# Altium PCB PCB1.PcbDoc
Units mm, origin at the board's own origin, x right, y up, seen from the top; angles counter-clockwise.
Board outline 46.86 x 32.13 mm, 2 copper layers (Top Layer, Bottom Layer); 34 components, 39 nets, 139 pads, 0 vias.
Unrouted connection lines stored in the file: 99.
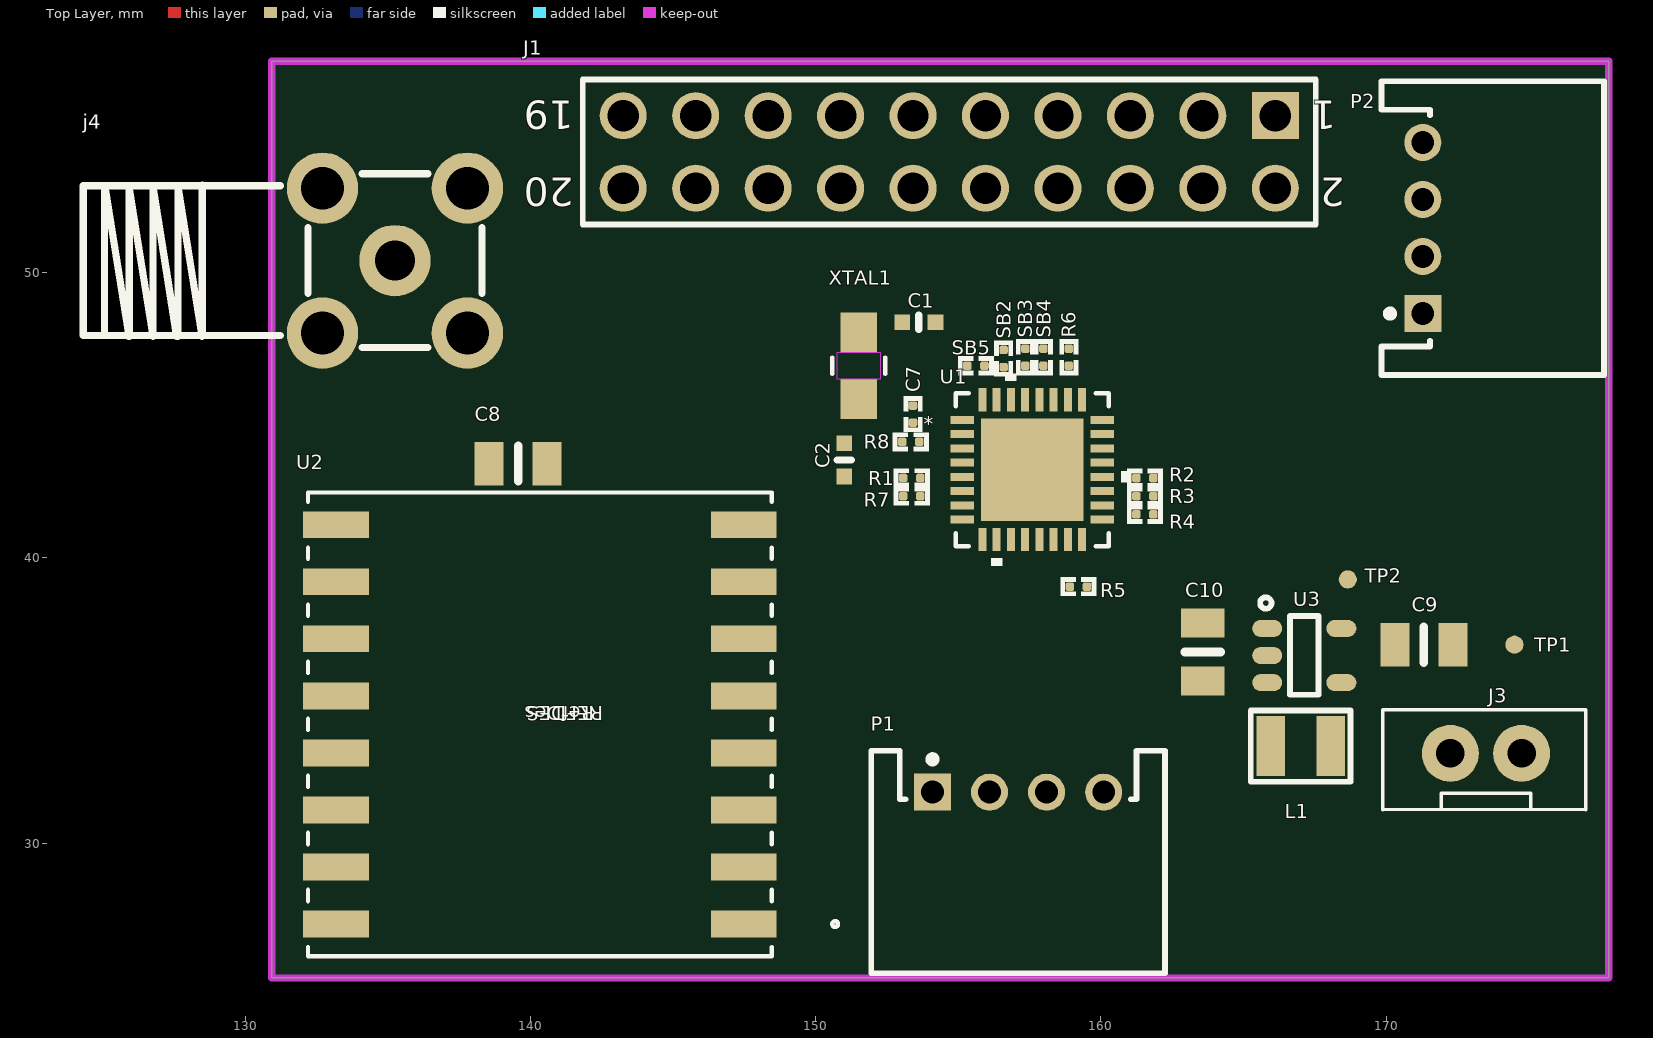
[diagram p0: Top Layer view]
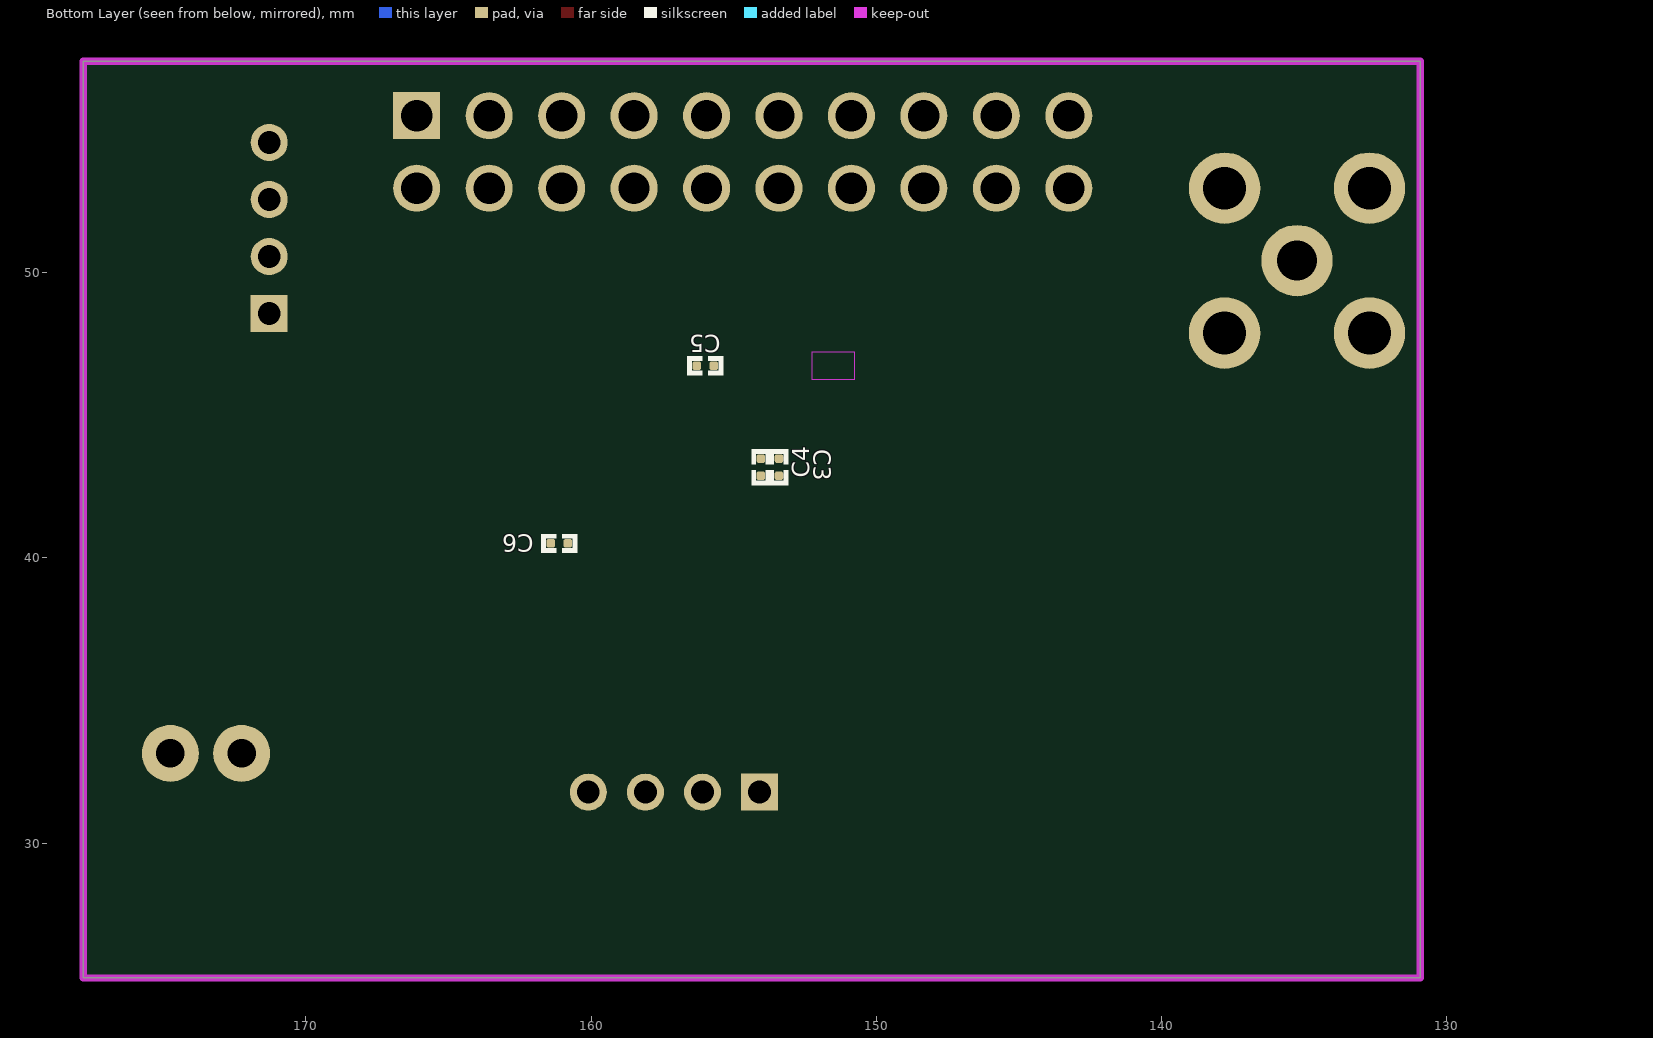
[diagram p1: Bottom Layer view, seen from below]

## Layer stack, top to bottom
Top Solder: solder mask 0.0102, Solder Resist, Dk 3.5
Top Layer: signal copper 0.0356
Dielectric 1: dielectric 0.32, FR-4, Dk 4.8
Bottom Layer: signal copper 0.0356
Bottom Solder: solder mask 0.0102, Solder Resist, Dk 3.5

## Board outline
130.937,25.273 177.8,25.273 177.8,57.404 130.937,57.404

## Design rules (kind name [scope] priority, off if disabled: settings)
Clearance [All] p1: gap=0.2 ignorepadtopadclearanceinfootprint=FALSE
PolygonConnect [All] p1: connectstyle=Relief reliefconductorwidth=0.254 reliefentries=4 polygonreliefangle="90 Angle" airgapwidth=0.254
RoutingVias [All] p1: holewidth=0.4 width=0.6 viastyle="Through Hole" minholewidth=0.3 minwidth=0.5 maxholewidth=0.8 maxwidth=1
SolderMaskExpansion [All] p1: expansion=0.102 istentingtop=FALSE
Width "Schematic Width Constraint_3" [InNet('VDD_MCU')] p1: maxlimit=0.4 minlimit=0.254 preferedwidth=0.3 minimp=50.000000 maximp=50.000000 favimp=50.000000
Width "Schematic Width Constraint_2" [InNet('GND')] p2: maxlimit=0.4 minlimit=0.254 preferedwidth=0.3 minimp=50.000000 maximp=50.000000 favimp=50.000000
Width [All] p3: maxlimit=0.2 minlimit=0.2 preferedwidth=0.2
30 further rules are at their usual default settings.

## Components (designator, comment, footprint, x,y, rotation, side; value= is the part's Value field where it differs from the comment)
C1 "7pF" SMD-0402C 153.619,48.258 r270 top
C2 "7pF" SMD-0402C 151.003,43.434 r0 top
C3 "100nF" Cap0201 153.416,43.178 r90 bottom
C4 "100nF" Cap0201 154.051,43.178 r90 bottom
C5 "100nF" Cap0201 156.002,46.734 r0 bottom
C6 "1µF" Cap0201 161.117,40.511 r180 bottom
C7 "100nF" Cap0201 153.416,45.037 r90 top
C8 "10µF" SMD-0805C 139.573,43.307 r90 top
C9 "10µF" SMD-0805C 171.323,36.957 r90 top
C10 "4.7µF" SMD-0805C 163.576,36.703 r0 top
J1 "2.54 mm_THT_Vertical_20 pin" 61302021121 154.686,54.229 r180 top
J3 "JST-2.54-2P-90" JST-2.54-2P-90 173.441,32.926 r270 top
j4 "ANTENNA-SMA-90" ANTENNA-SMA-90 135.255,50.419 r90 top
L1 "3.3uH/1.4A" INDP2520x12N 167.005,33.401 r0 top
P1 "62000411722" 62000411722 157.099,29.337 r0 top
P2 "62000411722" 62000411722 173.736,51.562 r90 top
R1 "10k" Res0201 153.37,42.801 r180 top
R2 "10k" Res0201 161.544,42.797 r0 top
R3 "10k" Res0201 161.544,42.162 r0 top
R4 "10k" Res0201 161.544,41.527 r0 top
R5 "10k" Res0201 159.212,38.989 r0 top
R6 "10k" Res0201 158.877,47.034 r90 top
R7 "10k" Res0201 153.37,42.162 r0 top
R8 "10k" Res0201 153.335,44.069 r0 top
SB2 "0R" Res0201 156.591,46.988 r90 top
SB3 "0R" Res0201 157.353,47.034 r90 top
SB4 "0R" Res0201 157.988,47.034 r90 top
SB5 "0R" Res0201 155.621,46.734 r0 top
TP1 "TPSMD_25mil" TPSMD_25mil 174.498,36.957 r90 top
TP2 "TPSMD_25mil" TPSMD_25mil 168.656,39.243 r90 top
U1 "STM32L072KBU6" UFQFPN32-5x5mm-L 157.595,43.089 r0 top
U2 "RFM95W-915S2" IC16_RFM95W-915S2_RFS 140.335,34.163 r180 top
U3 "RT8008-33GB" "SOT23, 5" 167.132,36.576 r0 top
XTAL1 "ABS07-166-32.768KHZ-T" XTAL_ABS07-166-32.768KHZ-T_ABR 151.511,46.734 r90 top

## Footprints (in the part's own frame and the unit in brackets; to place one, negate y for a bottom-side part, rotate by r counter-clockwise, add the part's x,y. Pads: shape width x height; smd on the part's side, far side on the other; paste and mask are expansions set on the pad)
61302021121 [mm] "Pin Header, pitch 2.54 mm, THT, Vertical, dual row, 20p"
  rect 1.65x1.65 hole 1.1: 1(-11.43,-1.27)
  round 1.65 hole 1.1: 2(-11.43,1.27) 3(-8.89,-1.27) 4(-8.89,1.27) 5(-6.35,-1.27) 6(-6.35,1.27) 7(-3.81,-1.27) 8(-3.81,1.27) 9(-1.27,-1.27) 10(-1.27,1.27) 11(1.27,-1.27) 12(1.27,1.27) 13(3.81,-1.27) 14(3.81,1.27) 15(6.35,-1.27) 16(6.35,1.27) 17(8.89,-1.27) 18(8.89,1.27) 19(11.43,-1.27) 20(11.43,1.27)
  silkscreen extent -12.85,-2.54 12.85,2.54, body extent -12.7,-2.54 12.7,2.54, height 8.59
62000411722 [mm] "2.00mm Male Horizontal Shrouded Header, 4p"
  rect 1.3x1.3 hole 0.8: 1(-3,2.45)
  round 1.3 hole 0.8: 2(-1,2.45) 3(1,2.45) 4(3,2.45)
  silkscreen extent -5.15,-3.9 5.15,3.9, body extent -5,-3.8 5,3.8, height 4.83
ANTENNA-SMA-90 [mm]
  round 2.5 hole 1.5 paste-2539.97 mask+0.051: 1(-2.54,2.54) 2(2.54,2.54) 3(2.54,-2.54) 4(-2.54,-2.54)
  round 2.5 hole 1.4 paste-2539.97 mask+0.051: 5(0,0)
  silkscreen extent -3.05,-3.05 3.05,10.92, body extent -3.5,-3.5 3.5,11, height 10
Cap0201 [mm] "CHIP Capacitor, 0.5x0.25mm, 0201"
  rrect50% 0.3x0.3 smd mask+0.05: 1(-0.3,0) 2(0.3,0)
  silkscreen extent -0.63,-0.32 0.63,0.33, body extent -0.44,-0.15 0.44,0.15, height 0.31
IC16_RFM95W-915S2_RFS [mm]
  rect 2.307x0.941 smd paste+0 mask+0: 1(-7.148,7) 2(-7.148,5) 3(-7.148,3) 4(-7.148,1) 5(-7.148,-1) 6(-7.148,-3) 7(-7.148,-5) 8(-7.148,-7) 9(7.148,-7) 10(7.148,-5) 11(7.148,-3) 12(7.148,-1) 13(7.148,1) 14(7.148,3) 15(7.148,5) 16(7.148,7)
  silkscreen extent -10.45,-8.13 8.13,8.13, body extent -8,-8 8,8, height 1.81
INDP2520x12N [mm]
  rect 1x2.1 smd: 1(-1.05,0) 2(1.05,0)
  silkscreen extent -1.75,-1.25 1.75,1.25, body extent -1.28,-1 1.22,1, height 1.2
JST-2.54-2P-90 [mm]
  round 2 hole 1: 1(-0.221,1.311) 2(-0.221,-1.189)
  silkscreen extent -1.75,-3.56 1.75,3.56, body extent -0.6,-3.61 7.43,3.61, height 5.94
Res0201 [mm] "CHIP Capacitor, 0.5x0.25mm, 0201"
  rrect50% 0.3x0.3 smd mask+0.05: 1(-0.3,0) 2(0.3,0)
  silkscreen extent -0.63,-0.32 0.63,0.33, body extent -0.44,-0.15 0.44,0.15, height 0.31
SMD-0402C [mm]
  rect 0.55x0.55 smd: 1(0,0.584) 2(0,-0.584)
  silkscreen extent -0.25,0 0.25,0, body extent -0.25,-0.51 0.25,0.51, height 0.51
SMD-0805C [mil]
  rect 60x40 smd: 1(0,40) 2(0,-40)
  silkscreen extent -25,0 25,0, body extent -25,-39 25,39, height 35
"SOT23, 5" [mm]
  oval 1.05x0.6 smd: 1(-1.3,0.95) 2(-1.3,0) 3(-1.3,-0.95) 4(1.3,-0.95) 5(1.3,0.95)
  silkscreen extent -1.55,-1.37 0.5,2.04, body extent -1.39,-1.47 1.41,1.43, height 1.45
TPSMD_25mil [mm] "Test Point, SMD Pad, Circle, 25mil X 25mil"
  round 0.635 smd paste-0.61 mask+0.076: 1(0,0)
UFQFPN32-5x5mm-L [mil]
  rect 32x11 smd paste-16 mask-16: 1(-96.5,68.9) 2(-96.5,49.21) 3(-96.5,29.53) 4(-96.5,9.84) 5(-96.5,-9.84) 6(-96.5,-29.53) 7(-96.5,-49.21) 8(-96.5,-68.9) 17(96.5,-68.9) 18(96.5,-49.21) 19(96.5,-29.53) 20(96.5,-9.84) 21(96.5,9.84) 22(96.5,29.53) 23(96.5,49.21) 24(96.5,68.9)
  rect 11x32 smd paste-16 mask-16: 9(-68.9,-96.5) 10(-49.21,-96.5) 11(-29.53,-96.5) 12(-9.84,-96.5) 13(9.84,-96.5) 14(29.53,-96.5) 15(49.21,-96.5) 16(68.9,-96.5) 25(68.9,96.5) 26(49.21,96.5) 27(29.53,96.5) 28(9.84,96.5) 29(-9.84,96.5) 30(-29.53,96.5) 31(-49.21,96.5) 32(-68.9,96.5)
  rect 142x142 smd paste-70.5 mask-71: 33(0,0)
  silkscreen extent -106,-132 132,132, body extent -103,-103 103,103, height 22
XTAL_ABS07-166-32.768KHZ-T_ABR [mil]
  rect 55x50 smd paste+0 mask+0: 1(-45.96,0) 2(45.96,0)
  Top Layer keep-out region: -18.96,-29.5 -18.96,29.5 18.96,29.5 18.96,-29.5
  Keep-Out Layer region: -18.96,-29.5 -18.96,29.5 18.96,29.5 18.96,-29.5
  silkscreen extent -11,-37 11,36, body extent -71,-43 71,43, height 35

## Part data
C1 C2: library part GJM1555C1H7R0DB01D, "CAP CER 7PF 50V NP0 0402", Digi-Key Part Number=490-13315-1-ND, Manufacturer="Murata Electronics North America", Operating Temperature="-55°C ~ 125°C", Package / Case="0402 (1005 Metric)", Ratings=-, Temperature Coefficient="C0G, NP0", Tolerance=±0.5pF, Voltage=50V, @ qty=0, Applications="RF, Microwave, High Frequency", Datasheets=http://www.murata.com/~/media/webrenewal/support/library/catalog/products/capacitor/mlcc/c02e.pdf, Factory Stock=0, Features="High Q, Low Loss", Height - Seated (Max)=-, Image=//media.digikey.com/Renders/Murata%20Renders/ZRB-SERIES-0402.jpg, Lead Spacing=-, Lead Style=-, Minimum Quantity=1, Mounting Type="Surface Mount, MLCC", Packaging="Cut Tape (CT)", Part Number=GJM1555C1H7R0DB01D, Part Status=Active, Quantity Available=9210, Series=GJM, Size / Dimension="0.039\" L x 0.020\" W (1.00mm x 0.50mm)", Thickness (Max)="0.022\" (0.55mm)", Unit Price (USD)=0.12
C3 C4 C5 C7: library part GRM033R61A104ME15D, "CAP CER 0.1UF 10V X5R 0201", Digi-Key Part Number=490-5405-1-ND, Manufacturer="Murata Electronics North America", Operating Temperature="-55°C ~ 85°C", Package / Case="0.024\" L x 0.012\" W (0.60mm x 0.30mm)", Ratings=-, Temperature Coefficient=X5R, Tolerance=±20%, Voltage=10V, @ qty=0, Applications="General Purpose", Datasheets=http://www.murata.com/~/media/webrenewal/support/library/catalog/products/capacitor/mlcc/c02e.pdf, Factory Stock=0, Failure Rate="Surface Mount, MLCC", Features=-, Height - Seated (Max)="0.013\" (0.33mm)", Image=//media.digikey.com/Renders/Murata%20Renders/ZRB-SERIES-0402.jpg, Lead Spacing=-, Minimum Quantity=1, Mounting Type="0201 (0603 Metric)", Packaging="Cut Tape (CT)", Part Number=GRM033R61A104ME15D, Part Status=Active, Quantity Available=295564, Series=GRM, Size / Dimension=-, Thickness (Max)=-, Unit Price (USD)=0.1
C6: library part GRM033R61A105ME15D, "CAP CER 1UF 10V X5R 0201", Digi-Key Part Number=490-13226-1-ND, Manufacturer="Murata Electronics North America", Operating Temperature="-55°C ~ 85°C", Package / Case="0.024\" L x 0.012\" W (0.60mm x 0.30mm)", Ratings=-, Temperature Coefficient=X5R, Tolerance=±20%, Voltage=10V, @ qty=0, Applications="General Purpose", Datasheets=http://www.murata.com/~/media/webrenewal/support/library/catalog/products/capacitor/mlcc/c02e.pdf, Factory Stock=0, Failure Rate="Surface Mount, MLCC", Features=-, Height - Seated (Max)="0.015\" (0.39mm)", Image=//media.digikey.com/Renders/Murata%20Renders/ZRB-SERIES-0402.jpg, Lead Spacing=-, Minimum Quantity=1, Mounting Type="0201 (0603 Metric)", Packaging="Cut Tape (CT)", Part Number=GRM033R61A105ME15D, Part Status=Active, Quantity Available=233419, Series=GRM, Size / Dimension=-, Thickness (Max)=-, Unit Price (USD)=0.37
C8 C9: library part GRJ21BR71A106KE01L, "CAP CER 10UF 10V X7R 0805", Digi-Key Part Number=490-10919-1-ND, Manufacturer="Murata Electronics North America", Operating Temperature="-55°C ~ 125°C", Package / Case="0805 (2012 Metric)", Ratings=-, Temperature Coefficient=X7R, Tolerance=±10%, Voltage=10V, @ qty=0, Applications="Boardflex Sensitive", Datasheets=http://www.murata.com/~/media/webrenewal/support/library/catalog/products/capacitor/mlcc/c02e.pdf, Factory Stock=0, Features="Soft Termination", Height - Seated (Max)=-, Image=//media.digikey.com/Renders/Murata%20Renders/0805%20(2012%20Metric)%20.85mm.jpg, Lead Spacing=-, Lead Style=-, Minimum Quantity=1, Mounting Type="Surface Mount, MLCC", Packaging="Cut Tape (CT)", Part Number=GRJ21BR71A106KE01L, Part Status=Active, Quantity Available=6658, Series=GRJ, Size / Dimension="0.079\" L x 0.049\" W (2.00mm x 1.25mm)", Thickness (Max)="0.057\" (1.45mm)", Unit Price (USD)=0.69
C10: library part GRM21BR60J475KA11L, "CAP CER 4.7UF 6.3V X5R 0805", Digi-Key Part Number=490-9749-1-ND, Manufacturer="Murata Electronics North America", Operating Temperature="-55°C ~ 85°C", Package / Case="0805 (2012 Metric)", Ratings=-, Temperature Coefficient=X5R, Tolerance=±10%, Voltage=6.3V, @ qty=0, Applications="General Purpose", Datasheets=http://www.murata.com/~/media/webrenewal/support/library/catalog/products/capacitor/mlcc/c02e.pdf, Factory Stock=0, Features=-, Height - Seated (Max)=-, Image=//media.digikey.com/Renders/Murata%20Renders/0805%20(2012%20Metric)%20.85mm.jpg, Lead Spacing=-, Lead Style=-, Minimum Quantity=1, Mounting Type="Surface Mount, MLCC", Packaging="Cut Tape (CT)", Part Number=GRM21BR60J475KA11L, Part Status=Active, Quantity Available=2821, Series=GRM, Size / Dimension="0.079\" L x 0.049\" W (2.00mm x 1.25mm)", Thickness (Max)="0.055\" (1.40mm)", Unit Price (USD)=0.28
J1: library part 61302021121, "Pin Header WR-PHD, pitch 2.54 mm, THT, Vertical, dual row, 20 pin", Contact Resistance="20 mOhm", Insulation Resistance=">1000 MOhm", Operating Temperature="-40 to 105 degC", Rated Current="3 A", Working Voltage="250 VAC", ComponentLink1Description=Manufacturer, ComponentLink1URL=http://www.we-online.de, ComponentLink2Description=Datasheet, ComponentLink2URL=http://katalog.we-online.de/em/datasheet/6130xx21121.pdf, Mounting Technology=THT, Orientation=Vertical, Part Number=61302021121, Pin Number=20, Pitch="2.54 mm", Published Date="Jan. 2018", Publisher="Wurth Elektronik", Row Number=Dual
J3: "Female Connector JST 2 Vias, 2.54mm 90º."
j4: "Connector SMA for Antenna, 90º.", JLCPCB PN=C914554
L1: library part ASPI-2515-3R3M-T2, "Inductor_3.3uH 20%_1.3A_SMD 25*20", MANF="Abracon LLC", MANF_P#=ASPI-2515-3R3M-T2, PARAM="Inductor 6.8uH 20% SMT 1.3A", PARAM2="138mOhm DCR, –25 to +120°C", PRICE=$0.28@100
P1 P2: "WR-WTB THT Male Horizontal Shrouded Header, pitch 2mm, 4p", Contact Resistance=20mOhm, Operating Temperature="-25 to +85degC", Rated Current=2A, Withstanding Voltage=800VAC, Working Voltage=125VAC, ComponentLink1Description=Manufacturer, ComponentLink1URL=http://www.we-online.de, ComponentLink2Description=Datasheet, ComponentLink2URL=https://www.we-online.com/catalog/datasheet/62000411722.pdf, Gender=Male, Mounting Technology=THT, Packaging=Bag, Part Number=62000411722, Pin Number=4, Pitch=2mm, Published Date="January 2020", Publisher="Wurth Elektronik", Type=Horizontal
R1 R2 R3 R4 R5 R6 R7 R8: library part ERJ-1GEF1002C, "RES SMD 10K OHM 1% 1/20W 0201", Digi-Key Part Number=P10.0KABCT-ND, Manufacturer="Panasonic Electronic Components", Operating Temperature="-55°C ~ 125°C", Package / Case="0201 (0603 Metric)", Power (Watts)="0.05W, 1/20W", Supplier Device Package=0201, Temperature Coefficient=±200ppm/°C, Tolerance=±1%, @ qty=1500, Composition="Thick Film", Datasheets=//media.digikey.com/pdf/Data%20Sheets/Panasonic%20Resistors%20Thermistors%20PDFs/ERJ_G,R,E_Rev08.pdf, Factory Stock=0, Failure Rate=-, Features=-, Height - Seated (Max)="0.010\" (0.26mm)", Image=//media.digikey.com/Renders/Panasonic%20Renders/ERJ-0201%20Pkg.jpg, Minimum Quantity=1, Number of Terminations=2, Packaging="Cut Tape (CT)", Part Number=ERJ-1GEF1002C, Part Status=Active, Quantity Available=2802306, Series=ERJ, Size / Dimension="0.024\" L x 0.012\" W (0.60mm x 0.30mm)", Unit Price (USD)=0.00933
SB2 SB3 SB4 SB5: library part RC0201JR-070RL, "RES_0 Ohm_ Jumper_1/16W_SMD 0402", ASSEMBLY=ASSEMBLY, MANF=Yageo, MANF_P#=RC0402JR-070RL, PARAM=1/16W, PARAM2="-55°C ~ 155°C", PRICE=$0.03717@100
U1: "No Description Available", Mfr_Name=STMicroelectronics, RefDes=RefDes, Type=Type
U2: "Description", Manufacturer_Name="RF Solutions", Copyright="Copyright (C) 2025 Ultra Librarian. All rights reserved.", Manufacturer_Part_Number=RFM95W-915S2, RefDes=RefDes, Type=Type
XTAL1: "Description", Manufacturer_Name=Abracon, Copyright="Copyright (C) 2025 Ultra Librarian. All rights reserved.", Manufacturer_Part_Number=ABS07-166-32.768KHZ-T

## Nets (pads, with @x,y where several pads share a name; then routed paths per layer and width w, separated by ;. In a path a pad name is that pad's centre, name@x,y a point inside that pad or via, vN(x,y) a via of type N, cw(c..) or ccw(c..) an arc to the next point about the centre after c; other vN are vias at no path point)
ANT: j4.5 U2.9
CS: U1.10 U2.5
GND: C1.1 C2.2 C3.2 C4.2 C5.2 C6.2 C7.2 C8.2 C9.2 C10.2 J1.14 J3.1 j4.1 j4.2 j4.3 j4.4 P1.2 P2.2 R7.1 SB5.1 TP1.1 U1.4 U1.16 U1.31 U1.33 U2.1 U2.8 U2.10 U3.2
GPIO0: J1.1 U1.7
GPIO1: J1.3 U1.8
GPIO2: J1.5 U1.9
GPIO3: J1.7 U1.21
GPIO4: J1.9 U1.22
GPIO5: J1.11 U1.14
GPIO6: J1.13 U1.27
GPIO7: J1.15 U2.7
GPIO8: J1.17 U2.16
GPIO9: J1.19 U2.15
GPIO10: J1.2 U2.14
GPIO11: J1.4 U2.12
GPIO12: J1.6 U2.11
I2C1_CLK: P1.3 R5.1 U1.15
I2C1_Data: P1.4 R6.1 U1.26
I2C2_CLK: P2.3 R2.1 U1.20
I2C2_Data: P2.4 R3.1 U1.19
MISO: U1.12 U2.2
MOSI: U1.13 U2.3
NetC10_1: C10.1 J3.2 U3.1 U3.4
NetL1_1: L1.1 U3.3
NetR4_1: R4.1 U1.18
NetR8_2: R8.2 U1.3
NetSB2_1: SB2.1 SB5.2 U1.30
NetSB3_1: SB3.1 U1.29
NetSB4_1: SB4.1 U1.28
OSC32_In: C1.2 U1.1 XTAL1.2
OSC32_Out: C2.1 U1.2 XTAL1.1
Reset: C7.1 J1.20 R8.1 U2.6
SCK: U1.11 U2.4
SWCLK: J1.16 U1.25
SWDIO: J1.18 U1.23
Uart_Rx: J1.10 SB3.2
Uart_Tx: J1.8 SB4.2
VCC_MONITOR: R1.1 R7.2 U1.6
VDD_MCU: C3.1 C4.1 C5.1 C6.1 C8.1 C9.1 J1.12 L1.2 P1.1 P2.1 R1.2 R2.2 R3.2 R4.2 R5.2 R6.2 SB2.2 TP2.1 U1.5 U1.17 U1.32 U2.13 U3.5
pads on no net: U1.24

## Keep-outs
Keep-Out Layer:
  the board outline again, w0.254

## Text inside footprints (layer, text, board x,y; h text height)
J1: Top Overlay "20" at 141.526,53.329 h1 r180; Top Overlay "19" at 141.526,56.029 h1 r180; Top Overlay "2" at 168.546,53.329 h1 r180; Top Overlay "1" at 168.246,56.029 h1 r180
U1: Top Overlay "*" at 153.785,44.454 h0.5; Mechanical 13 "*" at 155.233,44.454 h1.27
U2: Top Overlay "REFDES" at 142.558,34.798 h0.5 r180; Top Overlay "RefDes" at 142.24,34.798 h0.5 r180; Mechanical 13 "RefDes2" at 142.558,34.798 h1.27 r180